# Altium PCB PCB_Good.PcbDoc
Units mil, origin at the board's own origin, x right, y up, seen from the top; angles counter-clockwise.
Board outline 2100 x 3115 mil, 4 copper layers (Top Layer, Ground1, Gound2, Bottom Layer), stack 30.634 mil thick; 26 components, 12 nets, 116 pads, 29 vias.
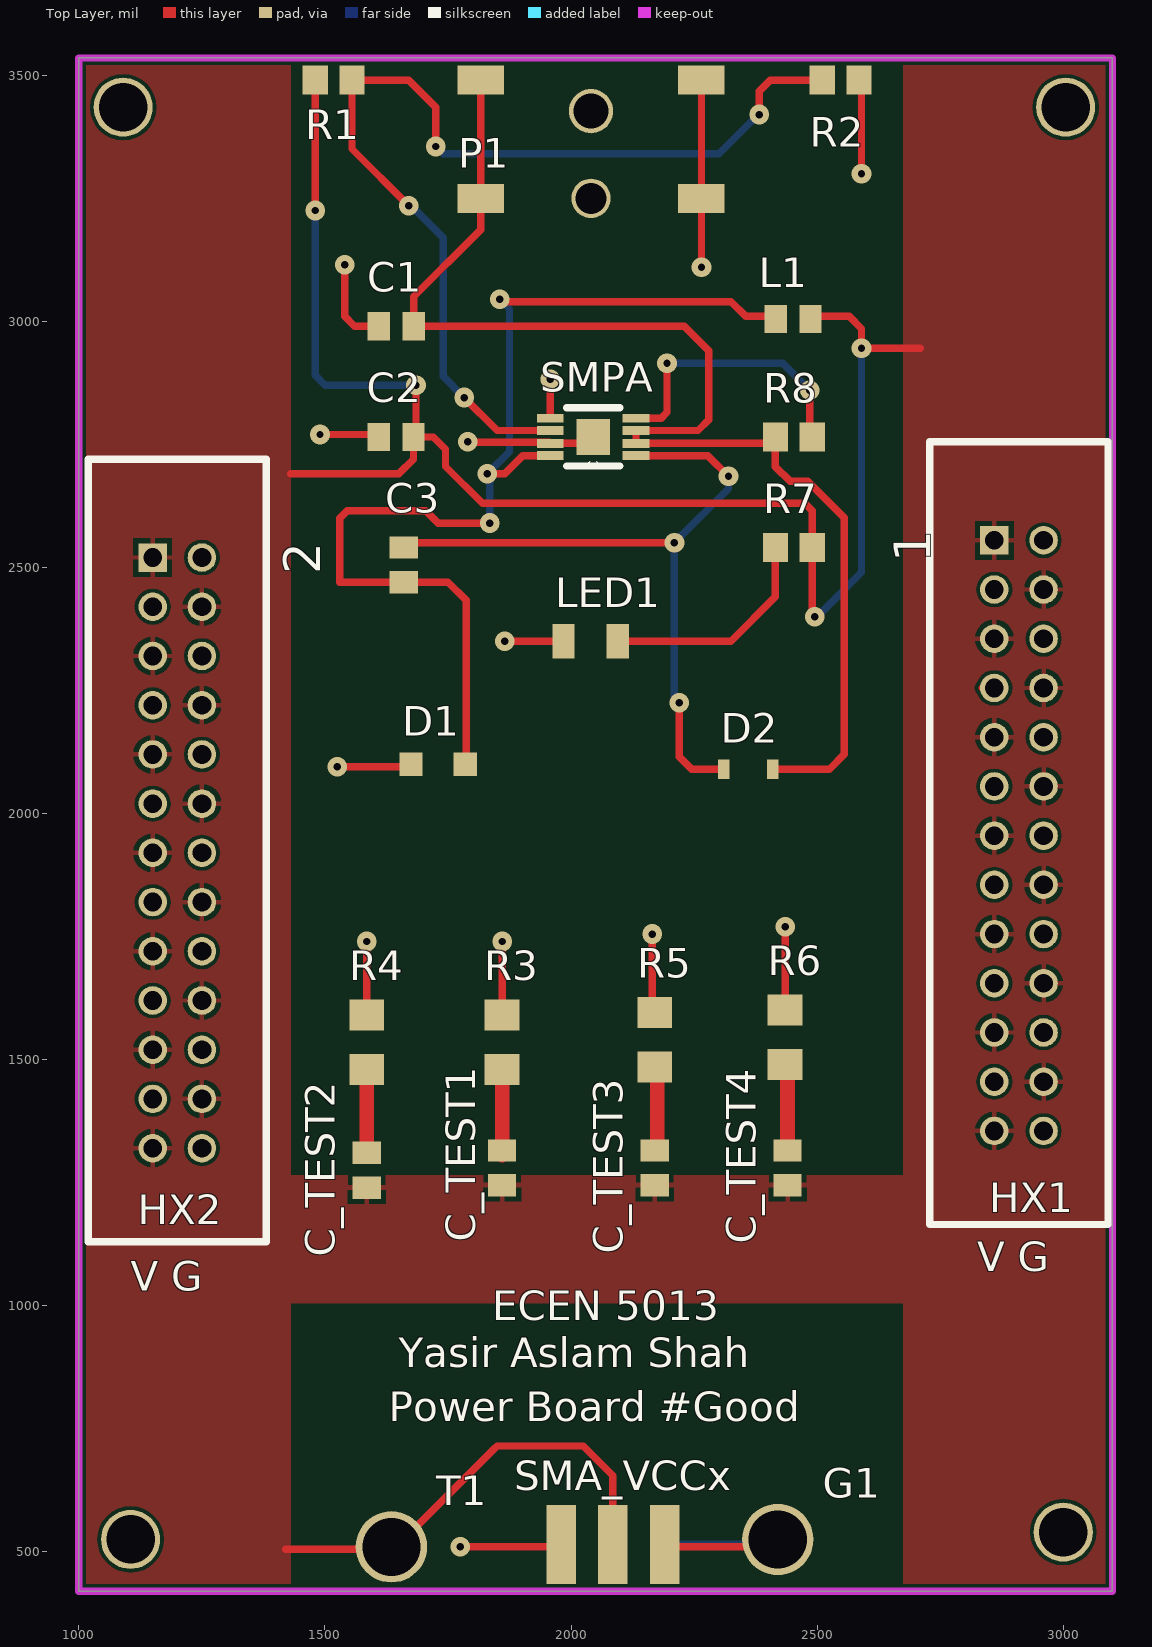
[diagram p0: Top Layer view]
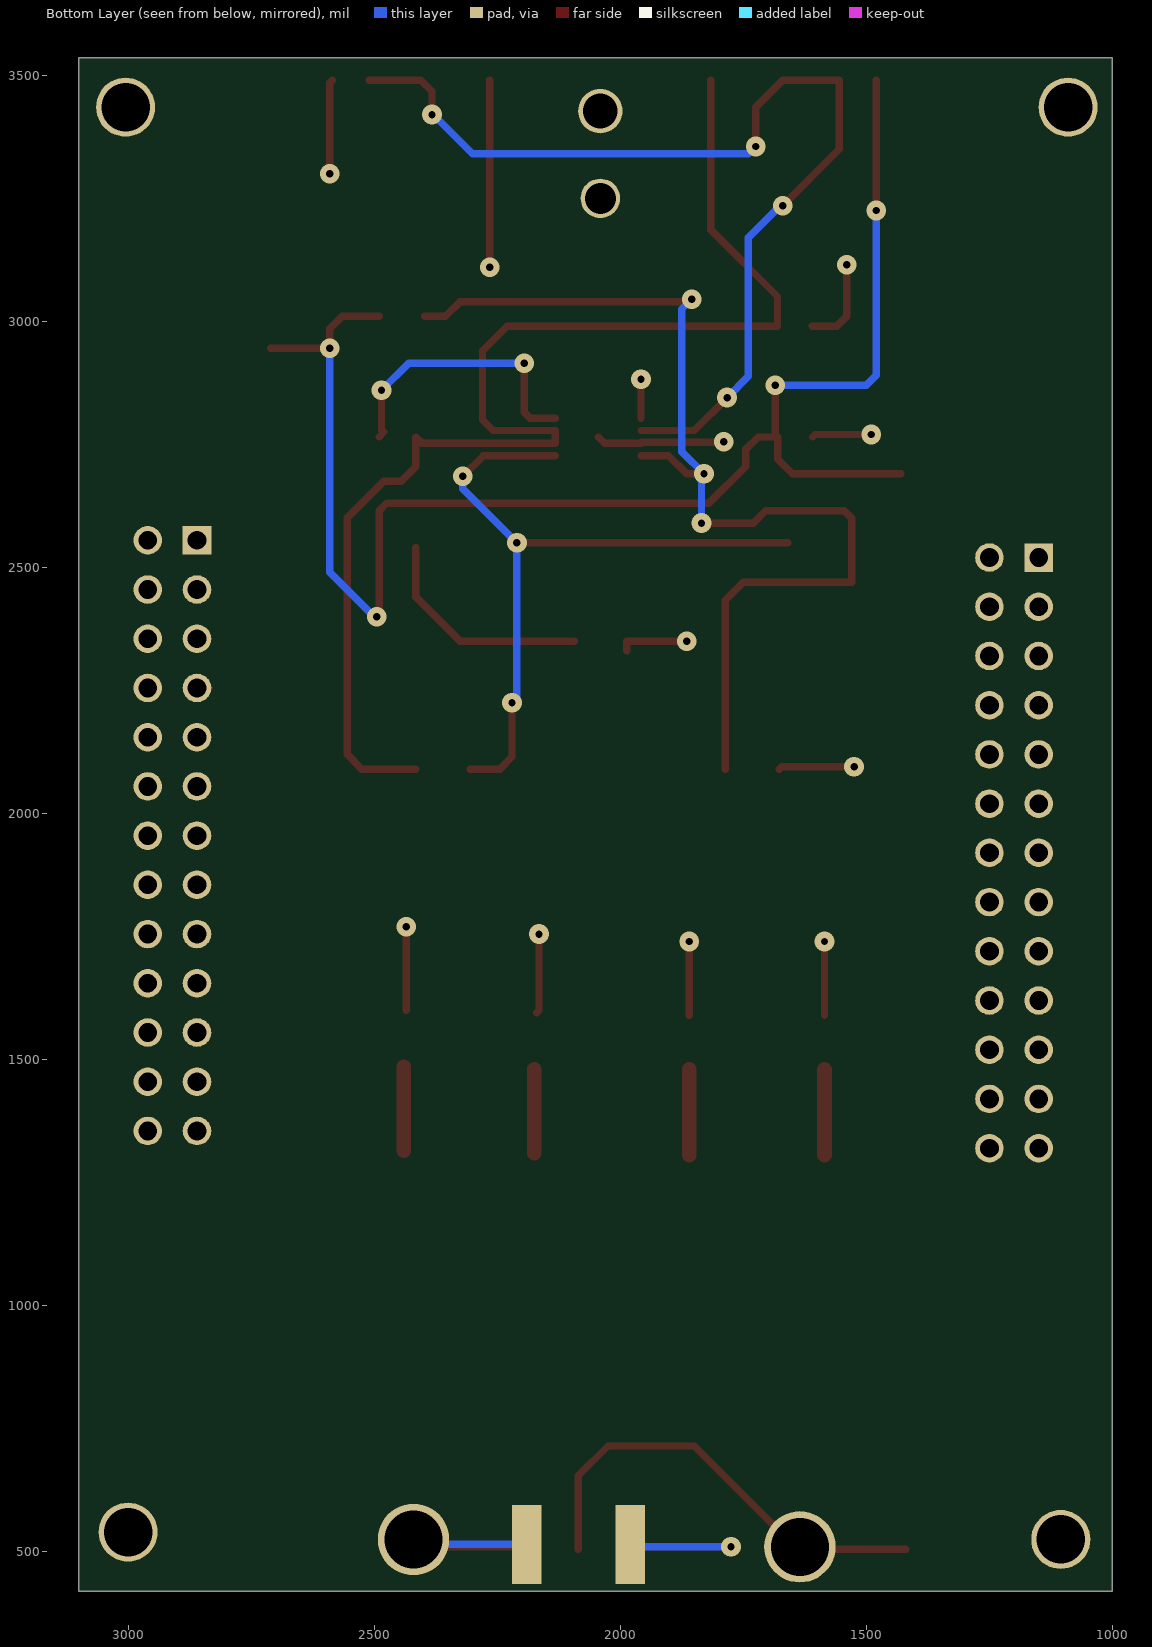
[diagram p1: Bottom Layer view, seen from below]
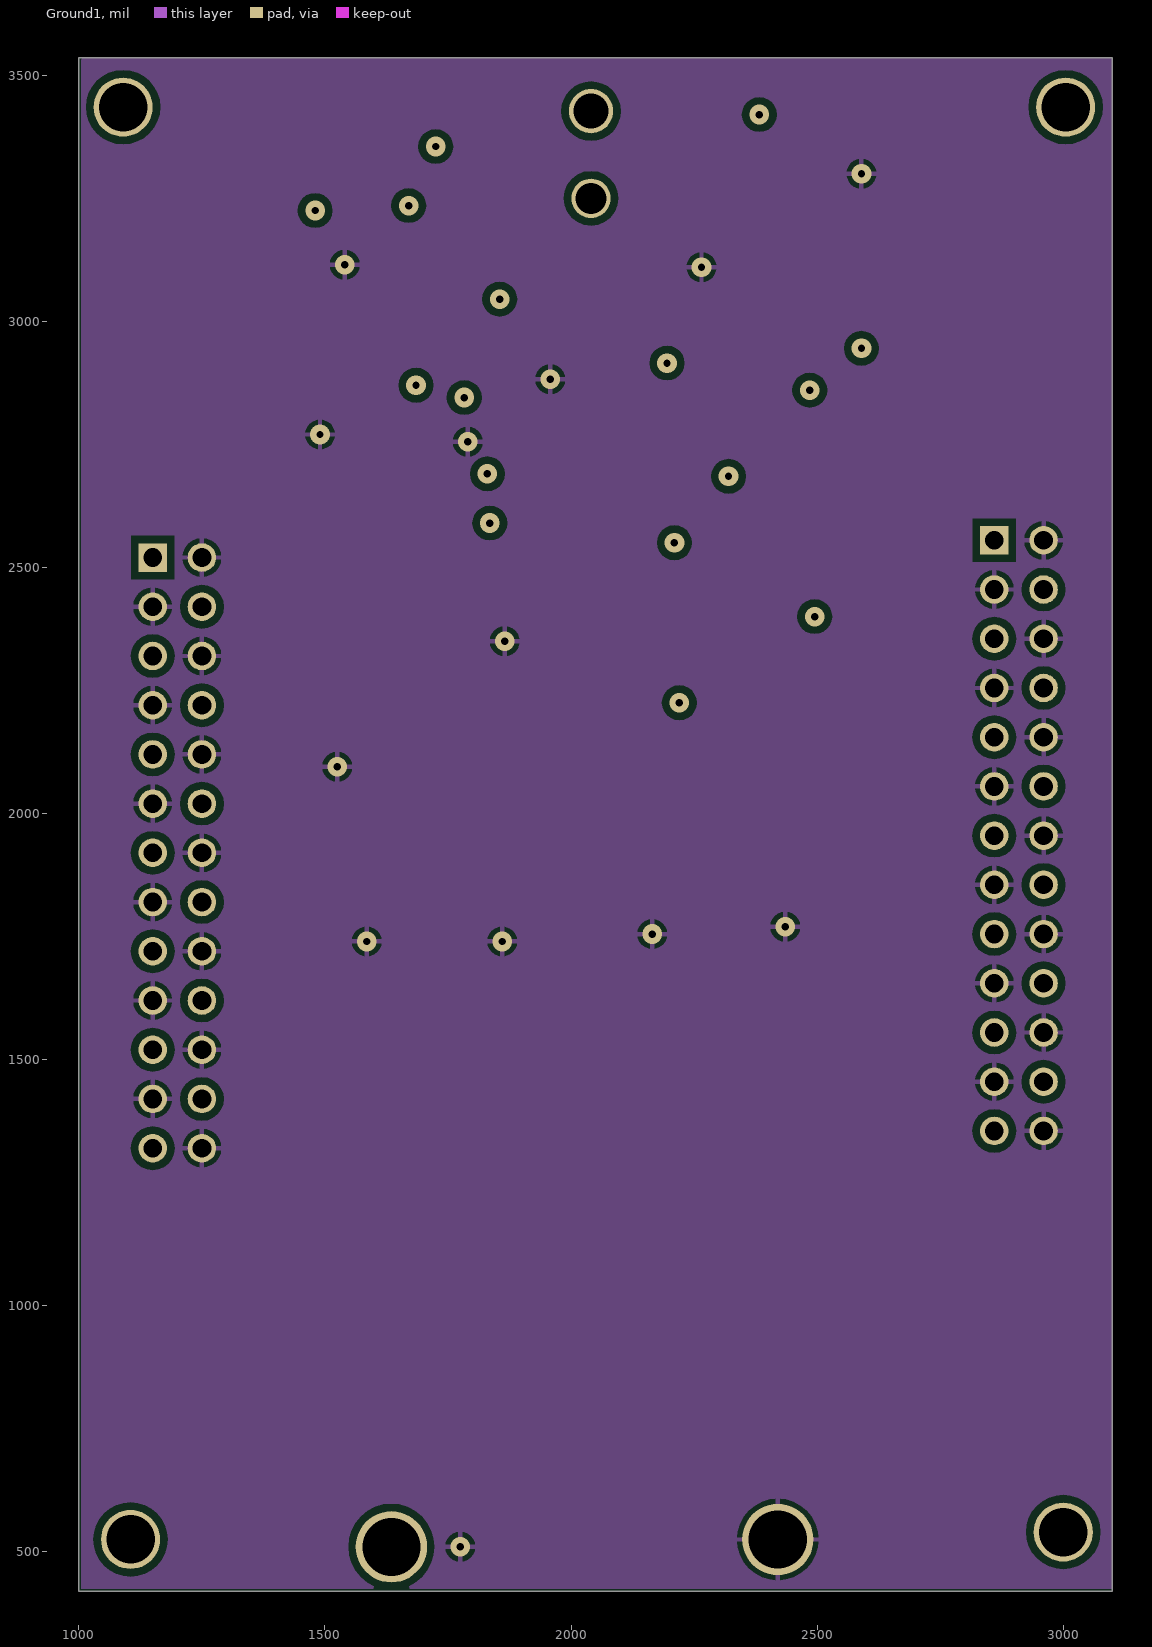
[diagram p2: Ground1]

## Layer stack, top to bottom
Top Solder: solder mask 0.4, Solder Resist, Dk 3.5
Top Layer: signal copper 1.4
Dielectric 1: core 10, FR-4, Dk 4.2
Ground1: signal copper 1.417
Dielectric 3: prepreg 5, Dk 4.2
Gound2: signal copper 1.417
Dielectric 2: core 10, Dk 4.2
Bottom Layer: signal copper 1.4
Bottom Solder: solder mask 0.4, Solder Resist, Dk 3.5

## Board outline
1000,420 3100,420 3100,3535 1000,3535

## Design rules (kind name [scope] priority, off if disabled: settings)
Clearance Clearance_1 [OnLayer('Ground1')] p1: gap=15 ignorepadtopadclearanceinfootprint=TRUE
Clearance Clearance_2 [OnLayer('Gound2')] p2: gap=15 ignorepadtopadclearanceinfootprint=TRUE
Clearance Clearance_3 [OnLayer('Ground1') vs InNet('No Net')] p3: gap=30 ignorepadtopadclearanceinfootprint=TRUE
Clearance Clearance_4 [OnLayer('Gound2') vs InNet('No Net')] p4: gap=30 ignorepadtopadclearanceinfootprint=TRUE
Clearance [All] p5: gap=7 ignorepadtopadclearanceinfootprint=FALSE except(0: Arc-Hole Track-Hole SMDPad-Hole THPad-Hole Via-Hole Fill-Hole Poly-Hole Region-Hole Text-Hole)
HoleSize [All] p1: absolutevalues=TRUE maxlimit=120 minlimit=1 maxpercent=80.000 minpercent=20.000
PolygonConnect [All] p1: connectstyle=Relief reliefconductorwidth=10 reliefentries=4 polygonreliefangle="90 Angle" airgapwidth=10
RoutingVias RoutingVias_1 [All] p1: holewidth=12 width=24 viastyle="Through Hole" minholewidth=12 minwidth=24 maxholewidth=12 maxwidth=24
RoutingVias [All] p2: holewidth=12 width=24 viastyle="Through Hole" minholewidth=12 minwidth=24 maxholewidth=12 maxwidth=24
SolderMaskExpansion [All] p1: expansion=4
Width [All] p1: maxlimit=50 minlimit=10 preferedwidth=10 midlayer1_maxwidth=10 midlayer2_maxwidth=10 minimp=50.000000 maximp=50.000000 favimp=50.000000
29 further rules are at their usual default settings.

## Components (designator, comment, footprint, x,y, rotation, side; value= is the part's Value field where it differs from the comment)
C1 "Cap Semi" CAPC2012X140N 1645,2990 r0 top value=10uF
C2 "Cap Semi" CAPC2012X140N 1644.57,2765 r0 top value=10uF
C3 "Cap Semi" CAPC2012X140N 1660,2505 r90 top value=0.1uF
C_TEST1 "Cap Semi" CAPC2012X140N 1860,1280 r90 top value=100uF
C_TEST2 "Cap Semi" CAPC2012X140N 1585,1275 r270 top value=10uF
C_TEST3 "Cap Semi" CAPC2012X140N 2170,1280 r270 top value=1uF
C_TEST4 "Cap Semi" CAPC2012X140N 2440,1280 r270 top value=0.1uF
D1 "Diode" D11 1875,2070 r0 top
D2 "Diode" D22s 2210,2075 r180 top
G1 "VCCx" PCBComponent_1 2535,545 r0 top
HX1 "" TYCO_1761606-9 2960,2555 r90 top
HX2 "" TYCO_1761606-9 1250,2520 r90 top
L1 "2.2uH" CAPC2012X140N 2451.26,3005 r0 top
LED1 "LED2" LED_User 2190,2330 r0 top
P1 "Power Jack" CUI_PJ-002AH-SMT-TR 2040.59,3369.92 r90 top
R1 "Res3" RESC2012X70 1517.6,3490 r0 top value=10K
R2 "Res3" RESC2012X70 2547.6,3490 r0 top value=10K
R3 "0.1ohm" RESC3216X65 1860,1535 r90 top
R4 "0.1ohm" RESC3216X65 1585,1535.12 r90 top
R5 "0.1ohm" RESC3216X65 2170,1540.12 r90 top
R6 "0.1ohm" RESC3216X65 2435,1545.12 r90 top
R7 "Res3" RESC2012X70 2452.6,2540 r0 top value=1K
R8 "Res3" RESC2012X70 2452.6,2765 r0 top value=100K
SMA_VCCx "SMA1" sma_UserDefined 1825,655 r180 top
SMPA "LM2738XMY" SOP65P490X110-9N 2045,2765 r180 top
T1 "VCCx" PCBComponent_1 1750,530 r0 top

## Footprints (in the part's own frame and the unit in brackets; to place one, negate y for a bottom-side part, rotate by r counter-clockwise, add the part's x,y. Pads: shape width x height; smd on the part's side, far side on the other; paste and mask are expansions set on the pad)
CAPC2012X140N [mm]
  rect 1.15x1.45 smd: 1(-0.9,0) 2(0.9,0)
CUI_PJ-002AH-SMT-TR [mm]
  rect 1.5x2.4 smd: 1(-3.05,5.7) 1(3.05,5.7) 2(-3.05,-5.7) 3(3.05,-5.7)
  round 2.032 hole 1.6 unplated: None(-3.05,0)
  round 2.286 hole 1.8 unplated: None(1.45,0)
D11 [mm]
  rect 1.2x1.2 smd: 1(-5.08,0.762) 2(-2.286,0.762)
D22s [mm]
  rect 0.59x1 smd: 1(-5.08,-0.381) 2(-2.54,-0.381)
LED_User [mil]
  rect 45x70 smd: 1(-95,20) 2(-205,20)
PCBComponent_1 [mil]
  round 145 hole 118.11: 1(-115,-20)
RESC2012X70 [mm]
  rect 1.3x1.5 smd: 1(-0.95,0) 2(0.95,0)
RESC3216X65 [mm]
  rect 1.6x1.8 smd: 1(-1.4,0) 2(1.4,0)
sma_UserDefined [mil]
  rect 60x160 smd: GND1(-365,140) GND4(-155,140) P(-260,140)
  rect 60x160 smd far side: GND2(-365,140) GND3(-155,140)
SOP65P490X110-9N [mil]
  rect 54x18 smd: 1(-87,38) 2(-87,13) 3(-87,-13) 4(-87,-38) 5(87,-38) 6(87,-13) 7(87,13) 8(87,38)
  rect 68x73 smd: 9(0,0)
  silkscreen extent -54,-59 54,59
TYCO_1761606-9 [mil]
  rect 58x58 hole 38: 1(0,100)
  round 58 hole 38: 2(0,0) 3(-100,100) 4(-100,0) 5(-200,100) 6(-200,0) 7(-300,100) 8(-300,0) 9(-400,100) 10(-400,0) 11(-500,100) 12(-500,0) 13(-600,100) 14(-600,0) 15(-700,100) 16(-700,0) 17(-800,100) 18(-800,0) 19(-900,100) 20(-900,0) 21(-1000,100) 22(-1000,0) 23(-1100,100) 24(-1100,0) 25(-1200,100) 26(-1200,0)
  silkscreen extent -1390,-131 200,231

## Part data
C1 C2 C3 C_TEST1 C_TEST2 C_TEST3 C_TEST4: "Capacitor (Semiconductor SIM Model)", LatestRevisionDate=29-May-2009, LatestRevisionNote="IPC-7351 Footprint Added.", PackageDescription="Chip Capacitor", PackageReference=C1206, Published=8-Jun-2000, Publisher="Altium Limited"
D1 D2: "Default Diode", Code_JEDEC=DO-214-AB, LatestRevisionDate=17-Jul-2002, LatestRevisionNote="Re-released for DXP Platform.", PackageDescription="DO-214-AB/SMC; 2 C-Bend Leads; Body 7.9 x 5.9 mm, inc. leads (LxW)", PackageReference=SMC, PackageVersion=Sep-1996, Published=8-Jun-2000, Publisher="Altium Limited"
G1 T1: library part "1Pin Header"
HX1 HX2: library part 1761606-9, "Header, Pin, Idc, Amp-Latch, 26 Pos, Low Profile, Pcb, Vertical, Black", Package=None, Availability=Good, EU_RoHS_Compliance=Compliant, Link=http://www.te.com/usa-en/product-1761606-9.html, MF="TE Connectivity", MP=1761606-9, Price="4.02 USD", SnapEDA_Link=https://www.snapeda.com/symbols-footprints/1761606-9/TE%20Connectivity%20AMP%20Connectors/view-part/?ref=snap
L1: library part MLP2012H2R2MT0S1, "Inductor Power Shielded Multi-Layer 2.2uH 20% 2MHz Ferrite 1A 195mOhm DCR 0805 Punched Paper T/R", Package="0805 TDK", Availability=Good, MF=TDK, MP=MLP2012H2R2MT0S1, Price="0.18 USD", SnapEDA_Link=https://www.snapeda.com/symbols-footprints/MLP2012H2R2MT0S1/TDK-Lambda%20Americas%20Inc/view-part/?ref=snap
LED1: "Typical RED, GREEN, YELLOW, AMBER GaAs LED", LatestRevisionDate=17-Jul-2002, LatestRevisionNote="Re-released for DXP Platform.", PackageDescription="SM LED; 2 Flat Leads", PackageReference=3.2X1.6X1.1, PackageVersion=Feb-2002, Published=8-Jun-2000, Publisher="Altium Limited"
P1: library part PJ-002AH-SMT-TR, "24 VDC 5 A Surface Mount Unshielded 2 Conductors 3 Contacts Male Power Jack", Package=None, Availability=Good, MF=CUI, MP=PJ-002AH-SMT-TR, Price="1.03 USD", SnapEDA_Link=https://www.snapeda.com/symbols-footprints/PJ-002AH-SMT-TR/CUI%20Inc/view-part/?ref=snap
R1 R2 R7 R8: "Resistor", LatestRevisionDate=29-May-2009, LatestRevisionNote="IPC-7351 Footprint Added.", PackageDescription="Chip Resistor", PackageReference=J1-0603, Published=8-Jun-2000, Publisher="Altium Limited"
R3 R4 R5 R6: library part Res3, "Resistor", LatestRevisionDate=29-May-2009, LatestRevisionNote="IPC-7351 Footprint Added.", PackageDescription="Chip Resistor", PackageReference=J1-0603, Published=8-Jun-2000, Publisher="Altium Limited"
SMA_VCCx: library part 1865, "Edge-Launch SMA Connector for 1.6mm / 0.062 Thick PCBs", Package=None, Availability=Bad, MF=Keystone, MP=1865, Price="2.38 USD", SnapEDA_Link=https://www.snapeda.com/symbols-footprints/1865/Keystone%20Electronics/view-part/?ref=snap
SMPA: "Swx Reg, Step d, Dc-Dc, 1.5a, 8soic", Package="SOIC-8 Texas Instruments", Availability=Unavailable, MF="Texas Instruments", MP=LM2738XMY, Price=None, SnapEDA_Link=https://www.snapeda.com/symbols-footprints/LM2738XMY/Texas%20Instruments/view-part/?ref=snap

## Free pads (board coordinates)
  round 120 hole 98.43: 3(1090,3435) 3(1105,525) 3(3000,540) 3(3005,3435)

## Via types
v1: diameter 40, hole 15, Top Layer to Bottom Layer, 29 vias

## Nets (pads, with @x,y where several pads share a name; then routed paths per layer and width w, separated by ;. In a path a pad name is that pad's centre, name@x,y a point inside that pad or via, vN(x,y) a via of type N, cw(c..) or ccw(c..) an arc to the next point about the centre after c; other vN are vias at no path point)
GND: C1.1 C2.1 D1.1 G1.1 HX1.2 HX1.3 HX1.6 HX1.7 HX1.10 HX1.11 HX1.14 HX1.15 HX1.18 HX1.19 HX1.22 HX1.23 HX1.26 HX2.2 HX2.3 HX2.6 HX2.7 HX2.10 HX2.11 HX2.14 HX2.15 HX2.18 HX2.19 HX2.22 HX2.23 HX2.26 LED1.2 P1.2 P1.3 R2.2 R3.2 R4.2 R5.2 R6.2 SMA_VCCx.GND1 SMA_VCCx.GND2 SMA_VCCx.GND3 SMA_VCCx.GND4 SMPA.5 SMPA.7 SMPA.9 | length 3083.1
  Top Layer w15: v1(1490,2770) 1604.13,2770 C2.1 ; v1(1525,2095) 1671.69,2095 D1.1@1676.69,2090 ; v1(1540,3115) 1540,3010 1560,2990 C1.1 ; R4.2 v1(1585,1740) ; v1(1775,510) SMA_VCCx.GND4@1975,510 ; v1(1790,2755) 1791,2754 1956,2754 SMPA.7 2032,2752 SMPA.9 ; R3.2 v1(1860,1740) ; v1(1865,2350) LED1.2 1986.85,2350 LED1.2@1986.85,2330 ; SMPA.5 v1(1958,2882) ; SMA_VCCx.GND4@1985,505 1975,515 SMA_VCCx.GND4@1990,530 ; v1(2165,1755) 2165,1600.24 R5.2 ; SMA_VCCx.GND1@2190,510 G1.1@2425,510 ; v1(2265,3110) P1.2 P1.3 ; G1.1@2420,500 G1.1@2425,500 ; R6.2 v1(2435,1770) ; R2.2 2590,3485 v1(2590,3300) ; HX1.7@2835,2255 HX1.7
  Bottom Layer w15: v1(1775,510) 1970,510 SMA_VCCx.GND3@1975,515 ; SMA_VCCx.GND2 2420,515 G1.1@2425,510
NetC3_1: C3.1 D1.2 L1.1 SMPA.8 | length 2254.1
  Top Layer w15: D1.2@1786.93,2090 1786.93,2433.07 1750,2470 1530,2470 1530,2600 1545,2615 1705,2615 1730,2590 v1(1835,2590) ; v1(1830,2690) 1865,2690 1902,2727 SMPA.8 ; v1@1855,3035 1855,3040 2325,3040 2355,3010 L1.1@2397.48,3010
  Bottom Layer w15: v1(1835,2590) 1835,2685 v1(1830,2690) 1875,2735 1875,3025 v1(1855,3045)
NetC3_2: C3.2 D2.2 SMPA.1 | length 1470.7
  Top Layer w15: C3.2@1660,2550 v1(2210,2550) ; SMPA.1 2278,2727 v1(2320,2685) ; v1(2220,2225) 2220,2115 2245,2090 D2.2@2305.24,2090
  Bottom Layer w15: v1(2220,2225) 2210,2235 v1(2210,2550) 2320,2660 v1(2320,2685)
NetC_TEST1_2: C_TEST1.2 R3.1 | length 174
  Top Layer w30: C_TEST1.2@1860,1305.87 C_TEST1.2 R3.1
NetC_TEST2_1: C_TEST2.1 R4.1 | length 174.1
  Top Layer w30: C_TEST2.1@1585,1305.87 C_TEST2.1 R4.1
NetC_TEST3_1: C_TEST3.1 R5.1 | length 177.1
  Top Layer w15: R5.1 R5.1@2175,1480
  Top Layer w30: C_TEST3.1@2175,1310 R5.1@2175,1480
NetC_TEST4_1: C_TEST4.1 R6.1 | length 176.6
  Top Layer w15: R6.1 R6.1@2440,1485
  Top Layer w30: C_TEST4.1 R6.1@2440,1485
NetLED1_1: LED1.1 R7.1 | length 459.2
  Top Layer w15: LED1.1@2093.15,2350 LED1.1 2325,2350 2415.2,2440.2 R7.1
NetR1_2: R1.2 R2.1 SMPA.6 | length 2099.3
  Top Layer w15: v1(1670,3235) 1555,3350 R1.2 1670,3490 1725,3435 v1(1725,3355) ; v1(1783,2845) 1850,2778 SMPA.6 ; v1(2382.5,3420) 2382.5,3467.5 2405,3490 R2.1
  Bottom Layer w15: v1(1670,3235) 1675,3235 1740,3170 1740,2888 v1(1783,2845) ; v1(1725,3355) 1740,3340 2300,3340 2380,3420 v1(2382.5,3420)
NetR8_2: R8.2 SMPA.4 | length 582
  Top Layer w15: SMPA.4 2183,2803 2195,2815 v1(2195,2915) ; v1(2485,2860) 2485,2780 2480,2775 R8.2
  Bottom Layer w15: v1(2195,2915) 2430,2915 v1(2485,2860)
VCCx: C2.2 C_TEST1.1 C_TEST2.2 C_TEST3.2 C_TEST4.2 HX1.1 HX1.4 HX1.5 HX1.8 HX1.9 HX1.12 HX1.13 HX1.16 HX1.17 HX1.20 HX1.21 HX1.24 HX1.25 HX2.1 HX2.4 HX2.5 HX2.8 HX2.9 HX2.12 HX2.13 HX2.16 HX2.17 HX2.20 HX2.21 HX2.24 HX2.25 L1.2 R1.1 R7.2 SMA_VCCx.P T1.1 | length 4107.9
  Top Layer w15: 1420,505 T1.1@1630,505 ; 1430,2690 1650,2690 1680,2720 C2.2 ; v1(1480,3225) 1480,3489.8 R1.1 ; T1.1 1645,510 1845,710 ; v1(1685,2870) 1685,2770 C2.2 ; 1850,715 2025,715 2085,655 SMA_VCCx.P SMA_VCCx.P@2085,505 ; L1.2@2490,3010 2565,3010 2590,2985 v1(2590,2945) 2710,2945 ; v1(2495,2400) 2490,2405 R7.2 2490,2615 2475,2630 1820,2630 1745,2705 1745,2740 1720,2765 C2.2
  Bottom Layer w15: v1(1480,3225) 1480,2890 1500,2870 v1(1685,2870) ; v1(2495,2400) 2500,2400 2590,2490 v1(2590,2945)
VIN: C1.2 D2.1 P1.1 R8.1 SMPA.2 SMPA.3 | length 2664.5
  Top Layer w15: P1.1@1816.18,3490 1816.18,3249.84 1816.18,3186.18 1680.43,3050.43 C1.2 2230,2990 2280,2940 2280,2800 2258,2778 SMPA.3 SMPA.2 2402.2,2752 R8.1 2415.2,2704.8 2445,2675 2480.72,2675 2555,2600.72 2555,2120 2525,2090 D2.1@2415,2090
pads on no net: P1.None

## Polygon pours and split planes (outlines as drawn)
VCCx on Top Layer "as" (solid, pour order 6): 1430,1265 1440,1265 2685,1265 2685,1040 2700,1025 2680,1005 1405,1005 1405,1255 1415,1265
VCCx on Top Layer "Layer1_VCCX2" (solid, pour order 4): 1000,420 1210,420 1430,420 1430,3535 1010,3535 1000,3525
VCCx on Top Layer "x" (solid, pour order 0): 3100,3535 3100,420 2675,420 2675,3535
GND on Ground1 "ground_cover_ground1" (solid, pour order 2): 995,3535 3100,3535 3100,425 1005,425 1005,3530 995,3540

## Keep-outs
Top Layer:
  the board outline again, w15

## Silkscreen, mask and mechanical layers (free items; w line width, h text height)
Top Overlay:
  text "V G" at 2825,1070 h60
  text "V G" at 1105,1030 h60
  text "ECEN 5013" at 1840,970 h60
  text "Yasir Aslam Shah" at 1650,875 h60
  text "Power Board #Good" at 1630,765 h60

## Text inside footprints (layer, text, board x,y; h text height)
HX1: Top Overlay "1" at 2730.25,2510.89 h73.82 r90; Mechanical 1 "1" at 2730.65,2510.96 h73.82 r90
HX2: Top Overlay "2" at 1490.46,2485.91 h73.82 r90; Mechanical 1 "2" at 1490.46,2485.91 h73.82 r90; Mechanical 1 "1" at 1190,2620 h73.82 r90